# Altium PCB signal_transfer_Pcb.PcbDoc
Units mil, origin at the board's own origin, x right, y up, seen from the top; angles counter-clockwise.
Board outline 1981.03 x 1978.53 mil, 2 copper layers (Top Layer, Bottom Layer); 45 components, 20 nets, 110 pads, 12 vias.
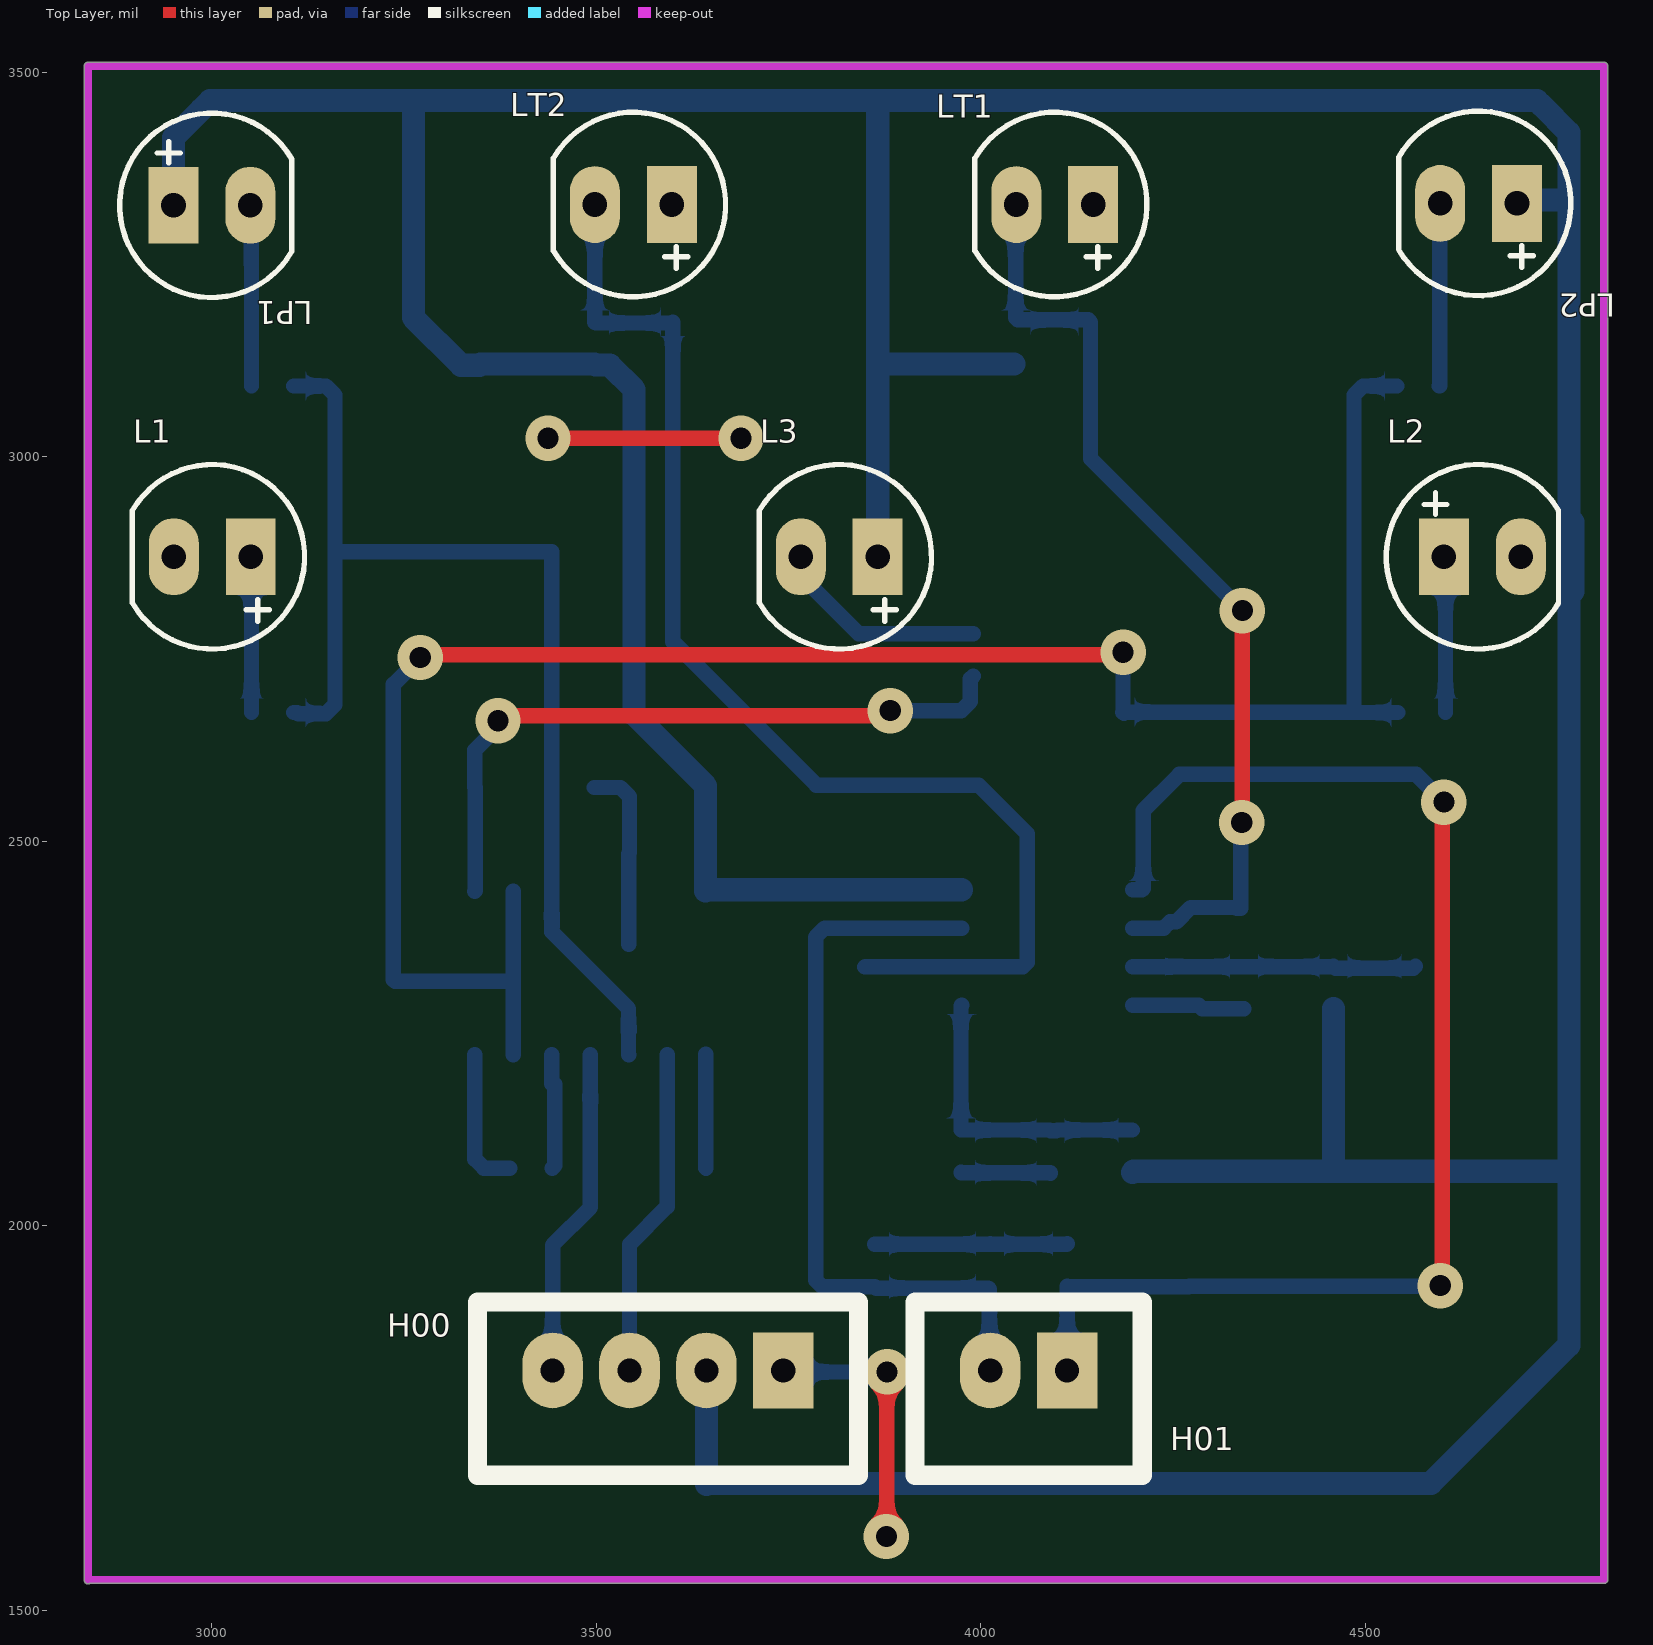
[diagram p0: Top Layer view]
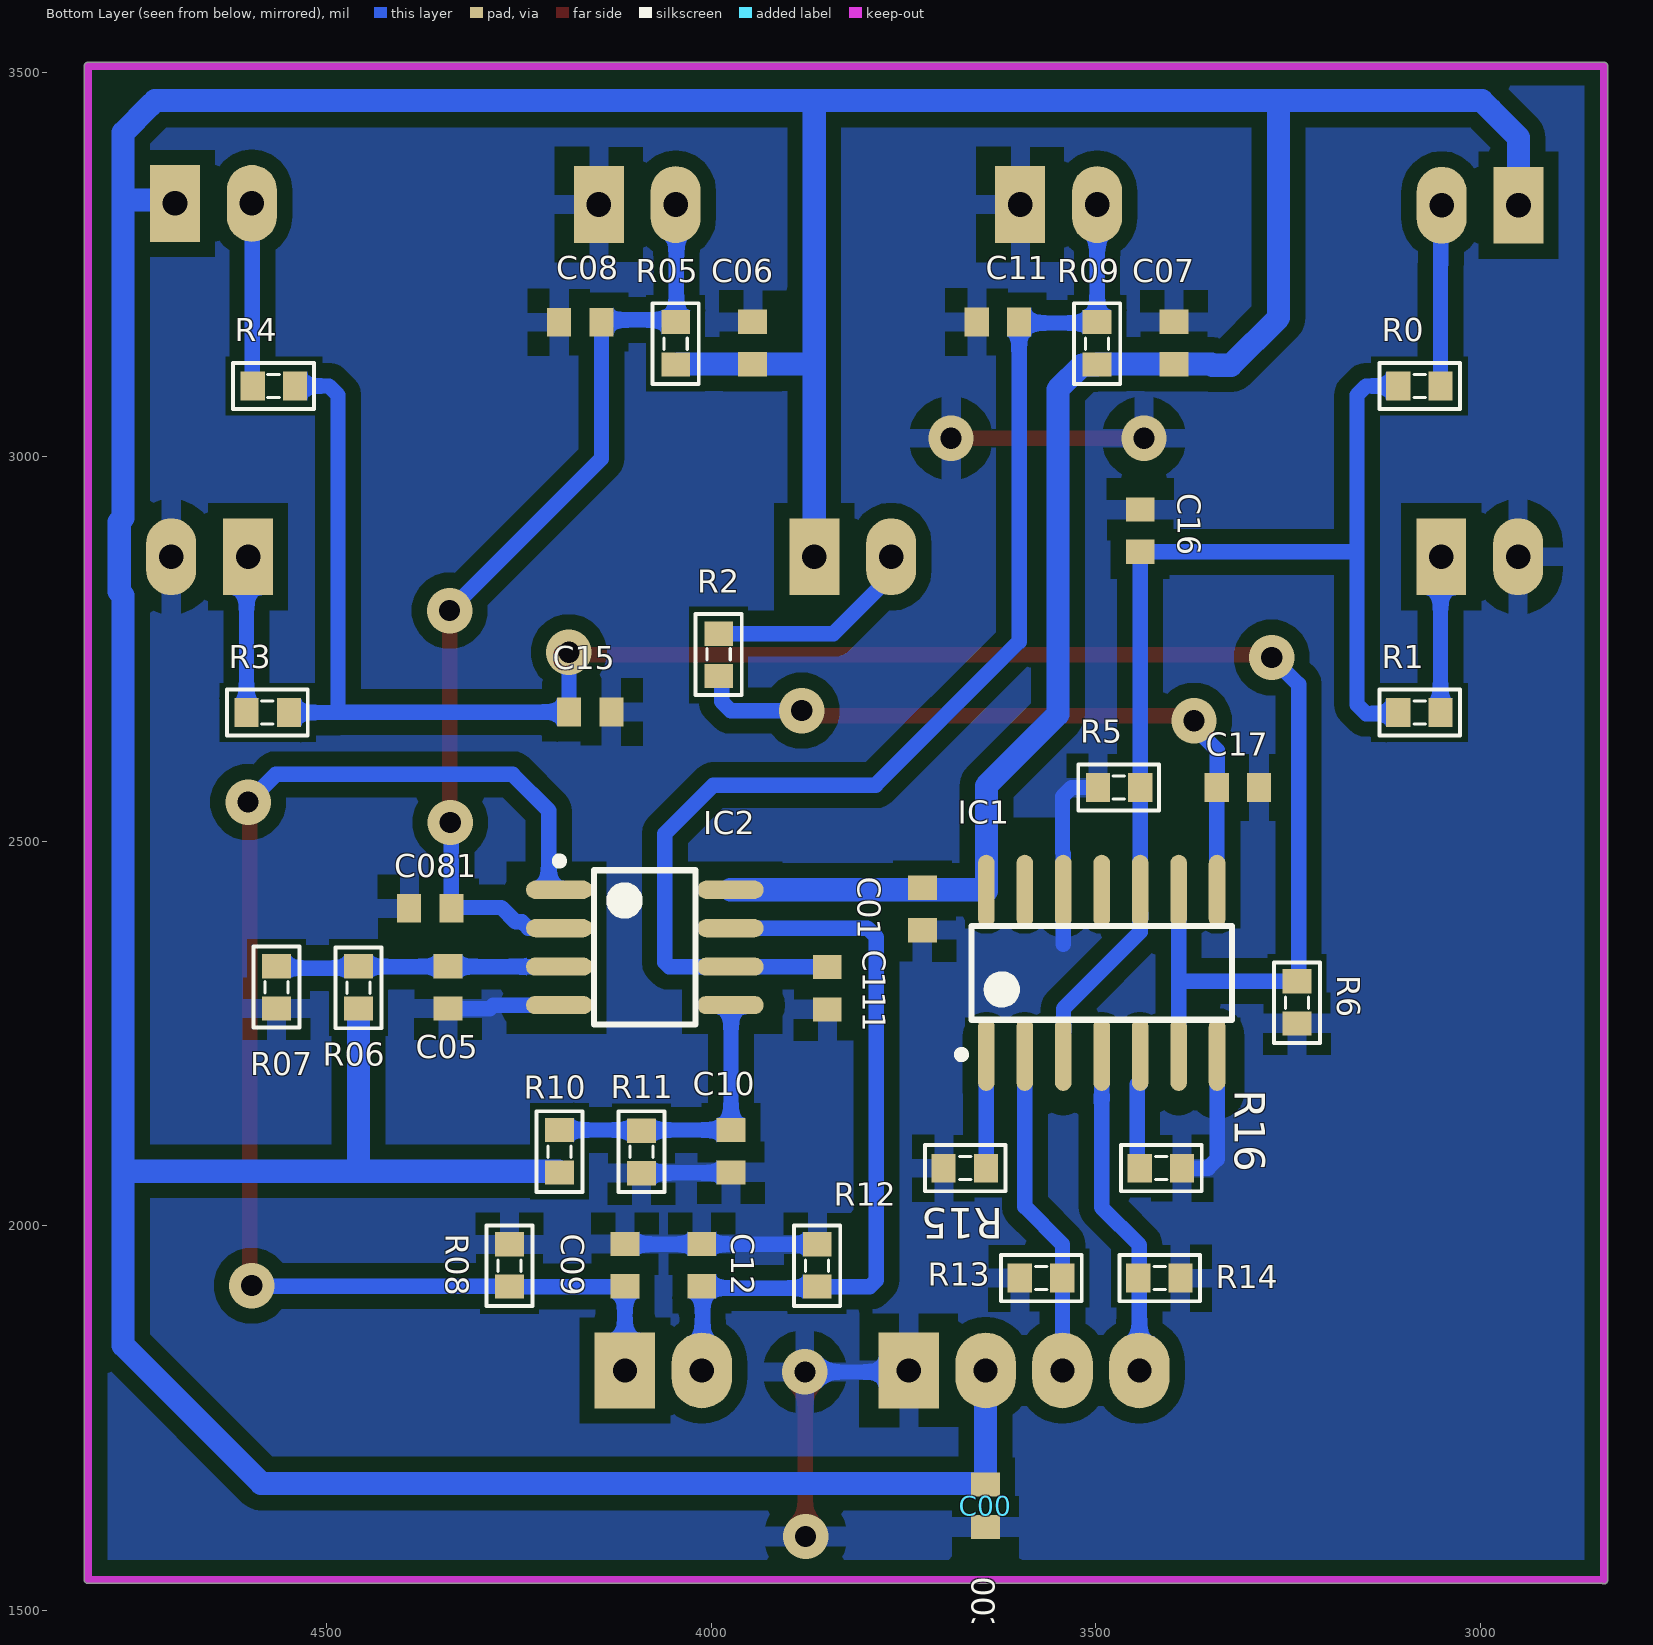
[diagram p1: Bottom Layer view, seen from below]
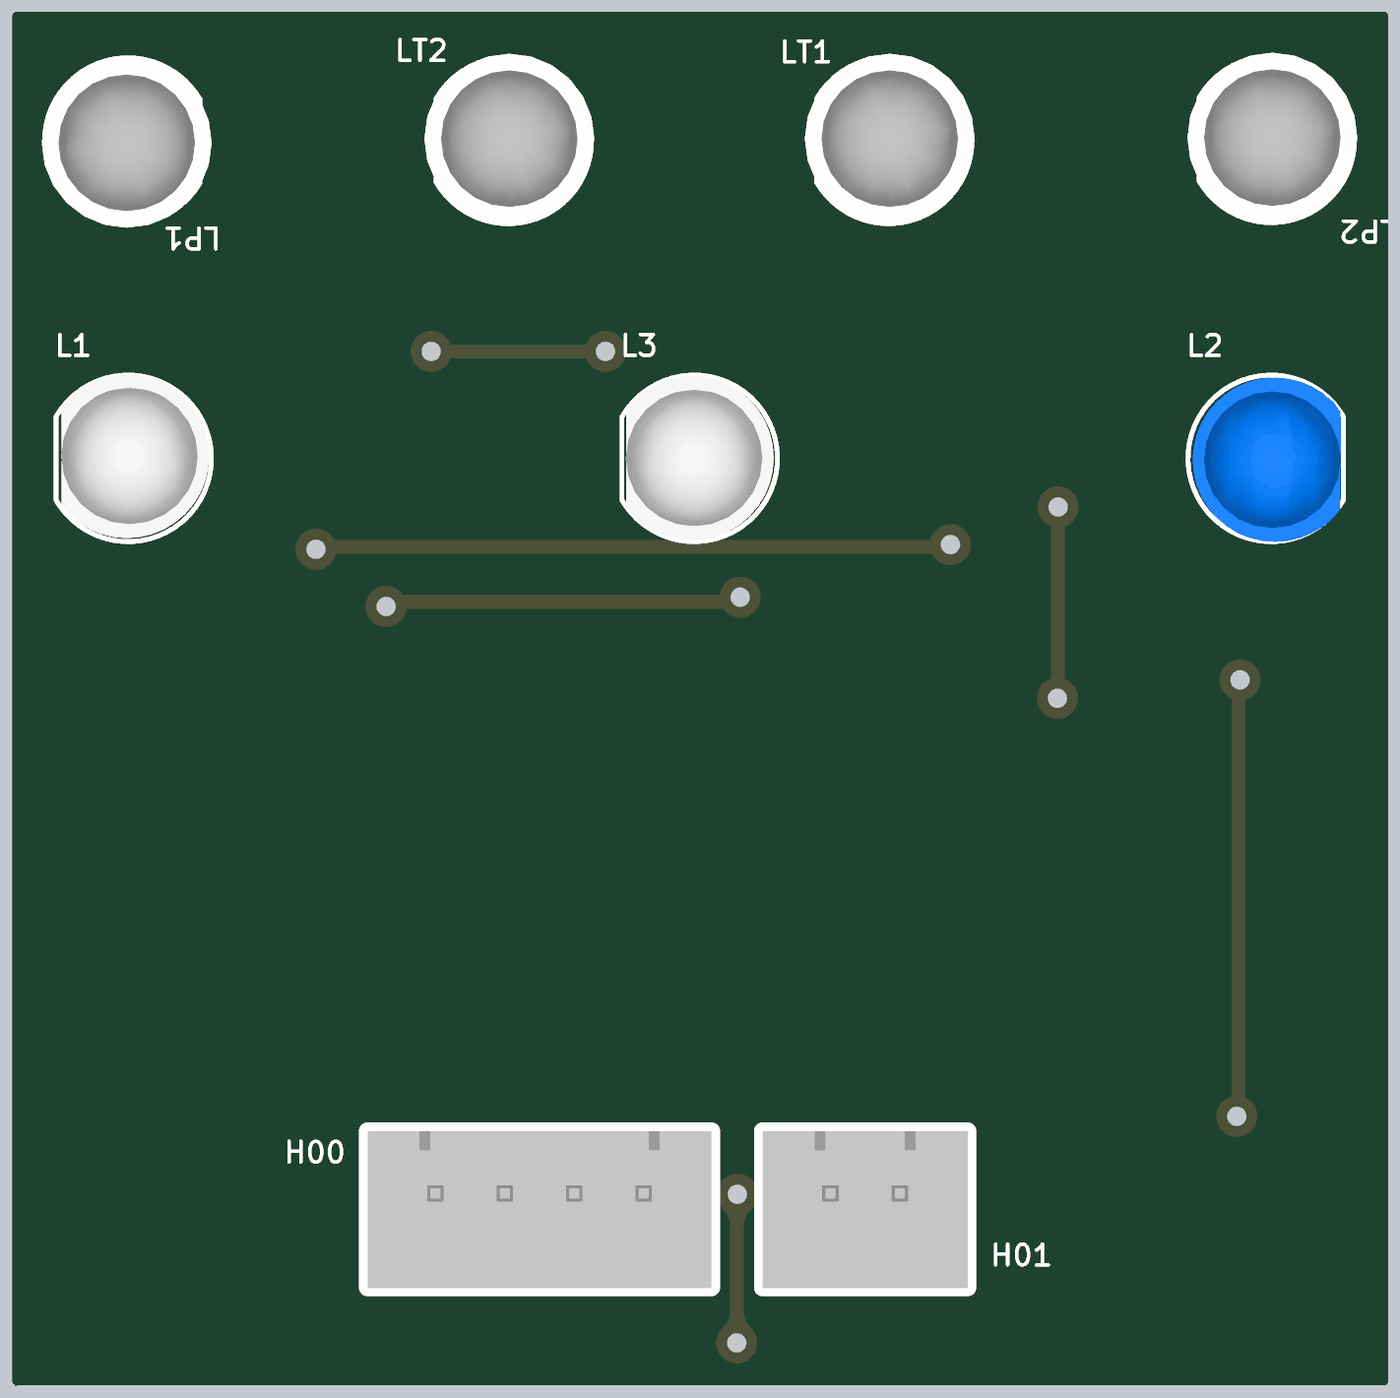
[diagram p2: 3D render of the assembled board from above, using the file's embedded part models]
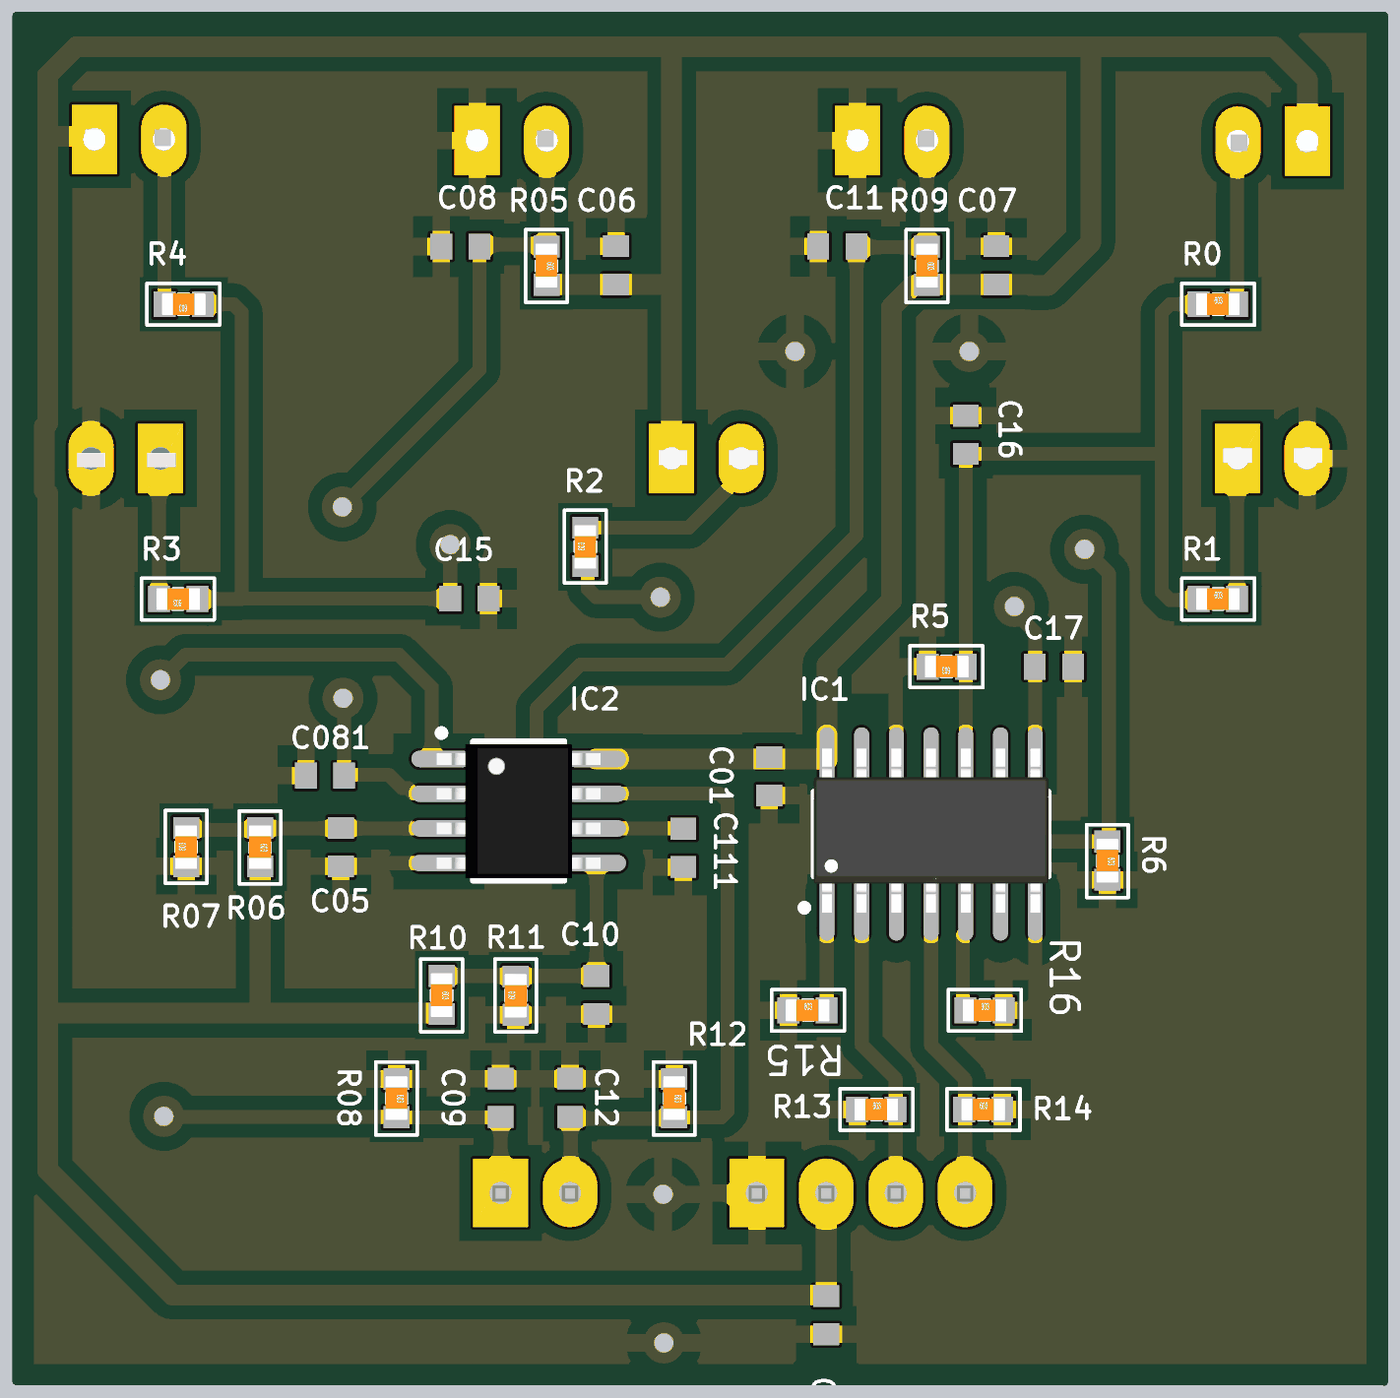
[diagram p3: 3D render of the assembled board from below, using the file's embedded part models]

## Layer stack, top to bottom
Top Solder: solder mask 0.4, Solder Resist, Dk 3.5
Top Layer: signal copper 1.4
Dielectric 1: dielectric 12.6, FR-4, Dk 4.8
Bottom Layer: signal copper 1.4
Bottom Solder: solder mask 0.4, Solder Resist, Dk 3.5

## Board outline
2833.99,1539.5 2833.99,1540.05 2833.99,3508 cw(c2839,3508) 2839,3513.01 4810,3513.01 cw(c4810,3508) 4815.02,3508 4815.02,1540 cw(c4810,1540) 4810,1534.99 2841.19,1534.98 cw(c2839,1539.5)

## Design rules (kind name [scope] priority, off if disabled: settings)
Clearance [All] p1: gap=20 ignorepadtopadclearanceinfootprint=FALSE
PolygonConnect [All] p1: connectstyle=Relief reliefconductorwidth=25 reliefentries=4 polygonreliefangle="90 Angle" airgapwidth=25
RoutingVias [All] p1: holewidth=28 width=50 viastyle="Through Hole" minholewidth=7.87 minwidth=39.37 maxholewidth=28 maxwidth=78.74
SolderMaskExpansion [All] p1: expansion=4 istentingtop=FALSE
Width [All] p1: maxlimit=50 minlimit=10 preferedwidth=20 minimp=50.000000 maximp=50.000000 favimp=50.000000
30 further rules are at their usual default settings.

## Components (designator, comment, footprint, x,y, rotation, side; value= is the part's Value field where it differs from the comment)
C00 "Cap Non-Pol SMD" CAP-SM-0603 3643,1636 r270 bottom value=0.1uF
C01 "Cap Non-Pol SMD" CAP-SM-0603 3725,2412 r270 bottom value=0.1uF
C05 "Cap Non-Pol SMD" CAP-SM-0603 4342,2310 r90 bottom value=0.1uF
C06 "Cap Non-Pol SMD" CAP-SM-0603 3945.92,3148 r90 bottom value=0.1uF
C07 "Cap Non-Pol SMD" CAP-SM-0603 3397.96,3148 r90 bottom value=0.1uF
C08 "Cap Non-Pol SMD" CAP-SM-0603 4170,3175 r0 bottom value=0.1uF
C09 "Cap Non-Pol SMD" CAP-SM-0603 4112,1949 r90 bottom value=0.1uF
C10 "Cap Non-Pol SMD" CAP-SM-0603 3974,2097 r270 bottom value=0.1uF
C11 "Cap Non-Pol SMD" CAP-SM-0603 3627,3175.12 r0 bottom value=0.1uF
C12 "Cap Non-Pol SMD" CAP-SM-0603 4012,1949 r90 bottom value=0.1uF
C15 "Cap Non-Pol SMD" CAP-SM-0603 4157,2668 r180 bottom value=0.1uF
C16 "Cap Non-Pol SMD" CAP-SM-0603 3442,2904 r90 bottom value=0.1uF
C17 "Cap Non-Pol SMD" CAP-SM-0603 3315,2570 r180 bottom value=0.1uF
C081 "Cap Non-Pol SMD" CAP-SM-0603 4365,2413 r0 bottom value=0.1uF
C111 "Cap Non-Pol SMD" CAP-SM-0603 3849,2309 r270 bottom value=0.1uF
H00 "Header 4P 2.54 Duc Thang" XH2.54M-4 3743,1812 r180 top
H01 "Header 2P 2.54 Duc Thang" XH2.54M-2 4112,1812 r180 top
IC1 "7432" SO14 3492,2329 r90 bottom
IC2 "LM358" SO8 4086,2362 r180 bottom
L1 "LED 5mm" LED-5MM-Yellow 3050.5,2870 r180 top
L2 "LED 5mm" LED-5MM-BLUE 4647,2870 r0 top
L3 "LED 5mm" LED-5MM-RED 3865.75,2870 r180 top
LP1 "LED 5mm" LED-5MM-WHITE 3000,3327 r0 top
LP2 "LED 5mm" LED-5MM-WHITE 4647,3329.5 r180 top
LT1 "LED 5mm" LED-5MM-WHITE 4095.92,3328 r180 top
LT2 "LED 5mm" LED-5MM-WHITE 3547.96,3328 r180 top
R0 "RESISTOR SMD" RES-SM-0603 3106,3092 r180 bottom value=2.49K
R1 "RESISTOR SMD" RES-SM-0603 3106,2667.44 r180 bottom value=220R
R2 "RESISTOR SMD" RES-SM-0603 3990,2715.44 r90 bottom value=220R
R3 "RESISTOR SMD" RES-SM-0603 4549.44,2667.44 r0 bottom value=220R
R4 "RESISTOR SMD" RES-SM-0603 4541.44,3092 r0 bottom value=2.49K
R5 "RESISTOR SMD" RES-SM-0603 3442.44,2570 r0 bottom value=10K
R05 "RESISTOR SMD" RES-SM-0603 4045.92,3174.56 r270 bottom value=10K
R6 "RESISTOR SMD" RES-SM-0603 3238,2317.56 r270 bottom value=10K
R06 "RESISTOR SMD" RES-SM-0603 4458.38,2337 r270 bottom value=18k
R07 "RESISTOR SMD" RES-SM-0603 4564.95,2283 r90 bottom value=27k
R08 "RESISTOR SMD" RES-SM-0603 4262,1975.56 r270 bottom value=10K
R09 "RESISTOR SMD" RES-SM-0603 3497.96,3174.56 r270 bottom value=10K
R10 "RESISTOR SMD" RES-SM-0603 4196.95,2124 r270 bottom value=18k
R11 "RESISTOR SMD" RES-SM-0603 4090.38,2069 r90 bottom value=27k
R12 "RESISTOR SMD" RES-SM-0603 3862,1975.56 r270 bottom value=10K
R13 "RESISTOR SMD" RES-SM-0603 3598,1932 r180 bottom value=10K
R14 "RESISTOR SMD" RES-SM-0603 3444,1932 r180 bottom value=10K
R15 "RESISTOR SMD" RES-SM-0603 3697,2075 r180 bottom value=10K
R16 "RESISTOR SMD" RES-SM-0603 3442,2075 r180 bottom value=10K

## Footprints (in the part's own frame and the unit in brackets; to place one, negate y for a bottom-side part, rotate by r counter-clockwise, add the part's x,y. Pads: shape width x height; smd on the part's side, far side on the other; paste and mask are expansions set on the pad)
CAP-SM-0603 [mm] "SMD Ceramic Capacitor Size 0603"
  rect 0.8x0.95 smd: 1(-0.7,0) 2(0.7,0)
  body extent -0.85,-0.45 0.85,0.45, height 0.6
LED-5MM-BLUE [mil] "LED 2 PIN, 5 ly , Only colour, pin to pin 110mil"
  rect 65x100 hole 32: 1(-45,0)
  oval 65x100 hole 32: 2(55,0)
  silkscreen extent -120,-120 104,120, body extent -113,-120 100,117, height 339
LED-5MM-RED [mil] "LED 2 PIN, 5 ly , Only colour,pin to pin 100mil"
  rect 65x100 hole 32: 1(0,0)
  oval 65x100 hole 32: 2(100,0)
  silkscreen extent -70,-120 154,120, body extent -65,-119 149,118, height 339
LED-5MM-WHITE [mil] "LED 2 PIN, 5 ly , Only colour, pin to pin 110mil"
  rect 65x100 hole 32: 1(-50,0)
  oval 65x100 hole 32: 2(50,0)
  silkscreen extent -120,-120 104,120, body extent -124,-125 121,120, height 340
LED-5MM-Yellow [mil] "LED 2 PIN, 5 ly , Only colour,pin to pin 100mil"
  rect 65x100 hole 32: 1(0,0)
  oval 65x100 hole 32: 2(100,0)
  silkscreen extent -70,-120 154,120, body extent -67,-122 147,115, height 339
RES-SM-0603 [mm]
  rect 0.8x0.95 smd: 1(-0.014,0) 2(1.386,0)
  silkscreen extent -0.64,-0.76 2.03,0.76, body extent -0.11,-0.4 1.49,0.4, height 0.3
SO8 [mm] "SOIC, 8-Leads, Body 4.9x3.9mm, Pitch 1.27mm, IPC High Density"
  oval 2.2x0.6 smd: 1(-2.825,1.905) 2(-2.825,0.635) 3(-2.825,-0.635) 4(-2.825,-1.905) 5(2.825,-1.905) 6(2.825,-0.635) 7(2.825,0.635) 8(2.825,1.905)
  silkscreen extent -2.95,-2.55 1.68,2.98, body extent -2.99,-2.45 3,2.45, height 1.6
SO14 [mm] "SOIC, 14-Leads, Body 8.60x3.90mm, Pitch 1.27mm, IPC Medium Density"
  oval 2.4x0.55 smd: 1(-2.7,3.81) 2(-2.7,2.54) 3(-2.7,1.27) 4(-2.7,0) 5(-2.7,-1.27) 6(-2.7,-2.54) 7(-2.7,-3.81) 8(2.7,-3.81) 9(2.7,-2.54) 10(2.7,-1.27) 11(2.7,0) 12(2.7,1.27) 13(2.7,2.54) 14(2.7,3.81)
  silkscreen extent -2.82,-4.3 1.55,4.76, body extent -2.87,-4.3 3.13,4.3, height 1.75
XH2.54M-2 [mm]
  rect 2x2.5 hole 0.8: 1(0,0)
  oval 2x2.5 hole 0.8: 2(2.54,0)
  silkscreen extent -2.48,-2.26 5.02,3.46, body extent -2.48,-2.26 5.02,3.48, height 6.91
XH2.54M-4 [mm]
  rect 2x2.5 hole 0.8: 1(0,0)
  oval 2x2.5 hole 0.8: 2(2.54,0) 3(5.08,0) 4(7.62,0)
  silkscreen extent -2.48,-2.26 10.1,3.46, body extent -2.48,-2.26 10.1,3.48, height 6.91

## Part data
C00 C01 C05 C06 C07 C08 C09 C10 C11 C12 C15 C16 C17 C081 C111: "Capacitor"
H00 H01: "Cắm", Chung_Loai=Cắm, Don_Vi=Con
  H00: Ma_Hang=MH001285, Ten_Linh_Kien="Header 4P XH2.54-4P Đực Thẳng"
  H01: Ma_Hang=MH001283, Ten_Linh_Kien="Header 2P XH2.54-2P Đực Thẳng"
IC1: "Quad 2-Input OR Gate"
IC2: "Low-Power Dual Operational Amplifier"
L1: library part "LED 5mm Vang", "Cắm", Chung_Loai=Cắm, Don_Vi=Con, Ma_Hang=MH008968, Ten_Linh_Kien="Led 5MM Phủ Vàng (1000c)"
L2: library part "LED 5mm Xanh Duong", "Cắm", Chung_Loai=Cắm, Don_Vi=Con, Ma_Hang=MH008987, Ten_Linh_Kien="Led 5MM Xanh Dương Đục (1000c)"
L3: library part "LED 5mm Do", "Cắm", Chung_Loai=Cắm, Don_Vi=Con, Ma_Hang=MH008967, Ten_Linh_Kien="Led 5MM Phủ Đỏ (1000c)"
LP1 LP2 LT1 LT2: library part "LED 5mm Trang", "Cắm", Chung_Loai=Cắm, Don_Vi=Con, Ma_Hang=MH008983, Ten_Linh_Kien="Led 5MM Trắng Đục (1000c)"
R0 R1 R2 R3 R4 R5 R05 R6 R06 R07 R08 R09 R10 R11 R12 R13 R14 R15 R16: "Resistor"

## Via types
v1: diameter 59.06, hole 27.56, Top Layer to Bottom Layer, tented both sides, 12 vias

## Nets (pads, with @x,y where several pads share a name; then routed paths per layer and width w, separated by ;. In a path a pad name is that pad's centre, name@x,y a point inside that pad or via, vN(x,y) a via of type N, cw(c..) or ccw(c..) an arc to the next point about the centre after c; other vN are vias at no path point)
GND: C00.2 C01.2 C05.1 C06.2 C07.2 C08.2 C09.2 C10.2 C11.2 C12.2 C15.2 C16.2 C17.2 C081.2 C111.2 H00.1 IC1.7 IC1.12 IC2.4 L1.2 L2.2 LT1.1 LT2.1 R5.2 R6.2 R07.1 R08.1 R11.1 R12.1 R13.1 R14.2 R15.1 R16.2 | length 1544.5
  Top Layer w20: v1(3437,3023.99) v1(3688,3023.99) ; v1(3877,1596) 3877.5,1596.5 3877.5,1809.5 v1(3878,1810)
  Bottom Layer w20: IC1.7 3342,2086.72 3353.72,2075 R16.2 ; R5.2 3531.28,2570 3543,2558.28 3543,2484.97 3542,2483.97 3542,2366 ; H00.1 3745,1810 v1(3878,1810) ; R12.1 4011.56,1976.12 C12.2 ; C10.2 3974.5,2068.94 4089.88,2068.94 R11.1 ; C12.2@4012.44,1976.12 4111.56,1976.12 C09.2 ; IC2.4 4283.16,2287 4287.71,2282.44 C05.1
IR_S1: C09.1 H01.1 IC2.1 R08.2 | length 1767.3
  Top Layer w20: v1(4597.25,1922.25) 4599.62,1924.62 4599.62,2548.62 v1(4602,2551)
  Bottom Layer w20: H01.1 C09.1 4112.44,1921 4269.96,1921 4270.58,1921.62 4596.62,1921.62 v1(4597.25,1922.25) ; IC2.1 4209.33,2437 4211,2438.67 4211,2540 4258,2587 4566,2587 v1(4602,2551)
IR_S2: C12.1 H01.2 IC2.7 R12.2 | length 977
  Bottom Layer w20: IC2.7 3796.72,2387 3785,2375.28 3785,1929.42 3793.42,1921 R12.2 3864,1919 4009.56,1919 4011,1917.56 H01.2@4011,1812
NetC05_2: C05.2 IC2.3 R06.1 R07.2 | length 369.9
  Bottom Layer w20: IC2.3 4342,2337 R06.1@4458.38,2337 ; R06.1 4460.94,2335 4562.39,2335 R07.2
NetC08_1: C08.1 C081.1 IC2.2 LT1.2 R05.1 | length 1244
  Top Layer w20: v1(4339.01,2524.47) 4339.5,2524.97 4339.5,2799.5 v1(4340,2800)
  Bottom Layer w20: LT1.2 4045,3327.08 4045,3180.87 4047.87,3178 4139.44,3178 C08.1 4142.44,2997.56 v1(4340,2800) ; IC2.2 4237.57,2387 4245.76,2395.19 4253.91,2395.19 4272.72,2414 4331.69,2414 4332.69,2413 C081.1 ; C081.1@4337.72,2413 4337.72,2523.19 v1(4339.01,2524.47)
NetC10_1: C10.1 IC2.5 R10.1 R11.2 | length 386.5
  Bottom Layer w20: IC2.5 3974,2286.22 C10.1 4089.38,2124.56 R11.2 4098.08,2123.56 4099.08,2124.56 R10.1
NetC11_1: C11.1 C111.1 IC2.6 LT2.2 R09.1 | length 1616.6
  Bottom Layer w20: LT2.2 3497.96,3304.04 3499,3303 3497.96,3301.96 R09.1 3499.08,3174 3598.32,3174 C11.1 3599.44,2759.56 3786,2573 3997,2573 4060,2510 4060,2342.43 4054.57,2337 IC2.6 3849.44,2337 C111.1
NetC15_1: C15.1 IC1.6 IC1.9 R3.1 R4.1 R6.1 | length 2623.1
  Top Layer w20: v1(3271,2739) 3274.39,2742.39 4181.39,2742.39 v1(4184.78,2745.78)
  Bottom Layer w20: v1(3271,2739) 3236,2704 3236,2320.12 R6.1 3391.12,2318.12 3392,2319 ; IC1.6 3392,2319 ; IC1.9 3392,2319 ; C15.1 4184.67,2668.11 4184.67,2745.67 v1(4184.78,2745.78) ; C15.1@4186,2666.56 4187.33,2667.89 4485,2667.89 ; 4485,2667.44 R3.1@4541.88,2667.44 ; 4485,2672 4485,3080.28 4496.72,3092 R4.1
NetC16_1: C16.1 IC1.3 IC1.10 R0.1 R1.1 R5.1 | length 1498.1
  Bottom Layer w20: R1.1 3110.87,2667.44 3112.31,2666 3148.28,2666 3160,2677.72 3160,2879 ; R0.1 3148.28,3092 3160,3080.28 3160,2879 ; IC1.3 3541.68,2223.02 3541.68,2282.32 3442,2382 IC1.10 3442,2570 R5.1 3442,2570.12 C16.1 3162.56,2876.44 3160,2879
NetC17_1: C17.1 IC1.8 R2.1 | length 893.4
  Top Layer w20: v1(3372,2656.72) 3378.64,2663.36 3875.36,2663.36 v1(3882,2670)
  Bottom Layer w20: IC1.8 3342.28,2435.58 3342.28,2570 3341.97,2570.31 3341.97,2618.7 3372,2648.73 v1(3372,2656.72) ; v1(3882,2670) 3974.58,2670 3986.29,2681.72 3986.29,2711.17 R2.1
NetIC1_1: IC1.1 R15.2 | length 148.3
  Bottom Layer w20: IC1.1@3642.3,2223 IC1.1 3642.22,2222.48 3642.22,2075.22 R15.2
NetIC1_5: IC1.5 R16.1 | length 152.7
  Bottom Layer w20: IC1.5 3442,2184.76 3442.76,2184 3446,2184 3446,2078.44 R16.1
NetL1_1: L1.1 R1.2 | length 202.9
  Bottom Layer w20: L1.1 3051.44,2869.06 R1.2
NetL2_1: L2.1 R3.2 | length 203.4
  Bottom Layer w20: L2.1 4604,2868 R3.2
NetL3_2: L3.2 R2.2 | length 280.3
  Bottom Layer w20: L3.2 3765.75,2845.07 3840.82,2770 R2.2
NetLP1_2: LP1.2 R0.2 | length 235.6
  Bottom Layer w20: LP1.2 3051.05,3325.95 3051.05,3250.45 3051.44,3250.06 R0.2
NetLP2_2: LP2.2 R4.2 | length 237.9
  Bottom Layer w20: R4.2 4596.5,3092.5 4596.5,3329 LP2.2
Sig_1: H00.3 IC1.2 R13.2 | length 431
  Bottom Layer w20: H00.3 3543,1923 3543,1976 3592,2025 IC1.2
Sig_2: H00.4 IC1.4 R14.1 | length 431
  Bottom Layer w20: H00.4 3443,1975 3492,2024 IC1.4
VCC: C00.1 C01.1 C06.1 C07.1 H00.2 IC1.14 IC2.8 L3.1 LP1.1 LP2.1 R05.2 R06.2 R09.2 R10.2 | length 8120.4
  Bottom Layer w30: LP1.1 2950,3415 2986,3451 2986,3451.28 2997.72,3463 3262,3463 ; R09.2@3497.52,3120.44 C07.1 3349.44,3120.44 3348,3119 3324,3119 3262,3181 3262,3463 ; R09.2 3498.71,3119.25 3517.28,3119.25 3549,3087.54 3549,2665 3642,2572 IC1.14@3642,2436.24 ; IC1.14 IC1.14@3642,2436.24 ; H00.2 C00.1 3644.44,1665 4585,1665 4764.5,1844.5 4764.5,2071 ; L3.1 3865.75,3120.44 3865.75,3460.75 3868,3463 ; 3866,3120.44 C06.1 R05.2@4043.05,3120.44 ; IC2.8 3715,2437 3642.76,2437 IC1.14@3642,2436.24 ; R10.2 4198.51,2071 4455.38,2071 ; R06.2 4458.38,2074 4455.38,2071 ; LP2.1 4701.5,3334 4761.5,3334 4764.5,3331 ; 3262,3463 3868,3463 ; 3868,3463 4723,3463 4728.97,3457.03 4764.5,3421.5 4764.5,3331 ; 4455.38,2071 4764.5,2071 ; 4764.5,2071 4764.5,2819.54 4769.5,2824.54 4769.5,2915.46 4764.5,2920.46 4764.5,3331
pads on no net: IC1.11 IC1.13

## Polygon pours and split planes (outlines as drawn)
GND on Bottom Layer "NONET_L-01_P-001" (solid, pour order 0): 2841.19,3513 4810,3513 4810,1540.05 2841.19,1540.05

## Keep-outs
Keep-Out Layer:
  lines w10: 2839,1539.5 2839,3508 4810,3508 4810,1540 2839,1540

## Other copper
Bottom Layer:
  pour cut-out: 3311,2153 3311,2271 3670,2271 3670,2153
  pour cut-out: 4135.49,2474 4266.49,2474 4266.49,2249 4135.49,2249
  pour cut-out: 3907,2474 4038,2474 4038,2249 3907,2249
  pour cut-out: 3311,2386 3311,2531 3670,2531 3670,2386